# EAGLE board MP1584cir (EAGLE 9.3.0)
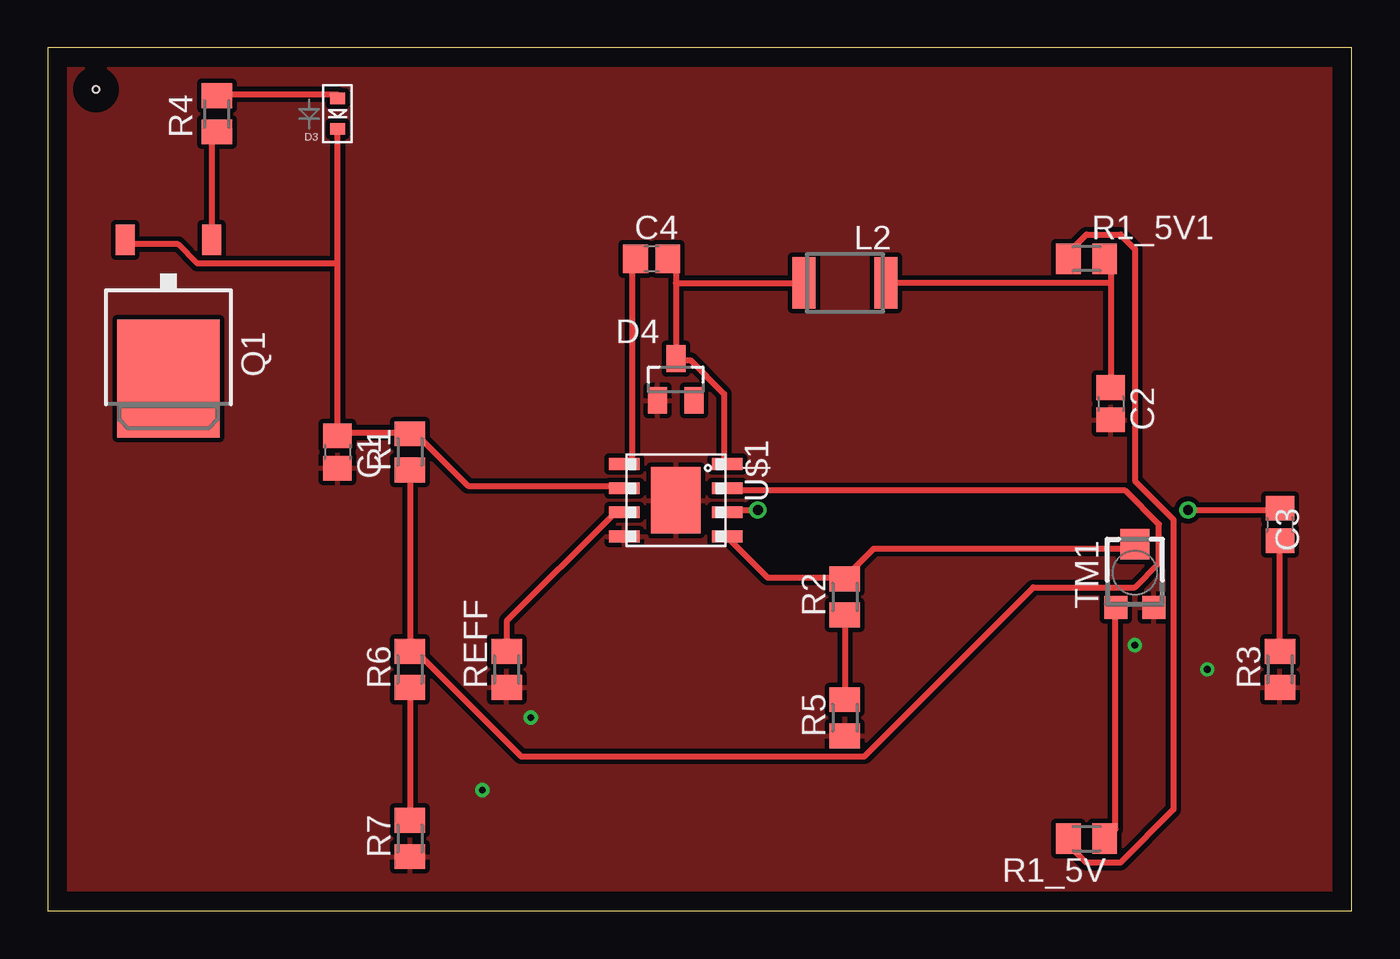
[diagram p0: board, top side]
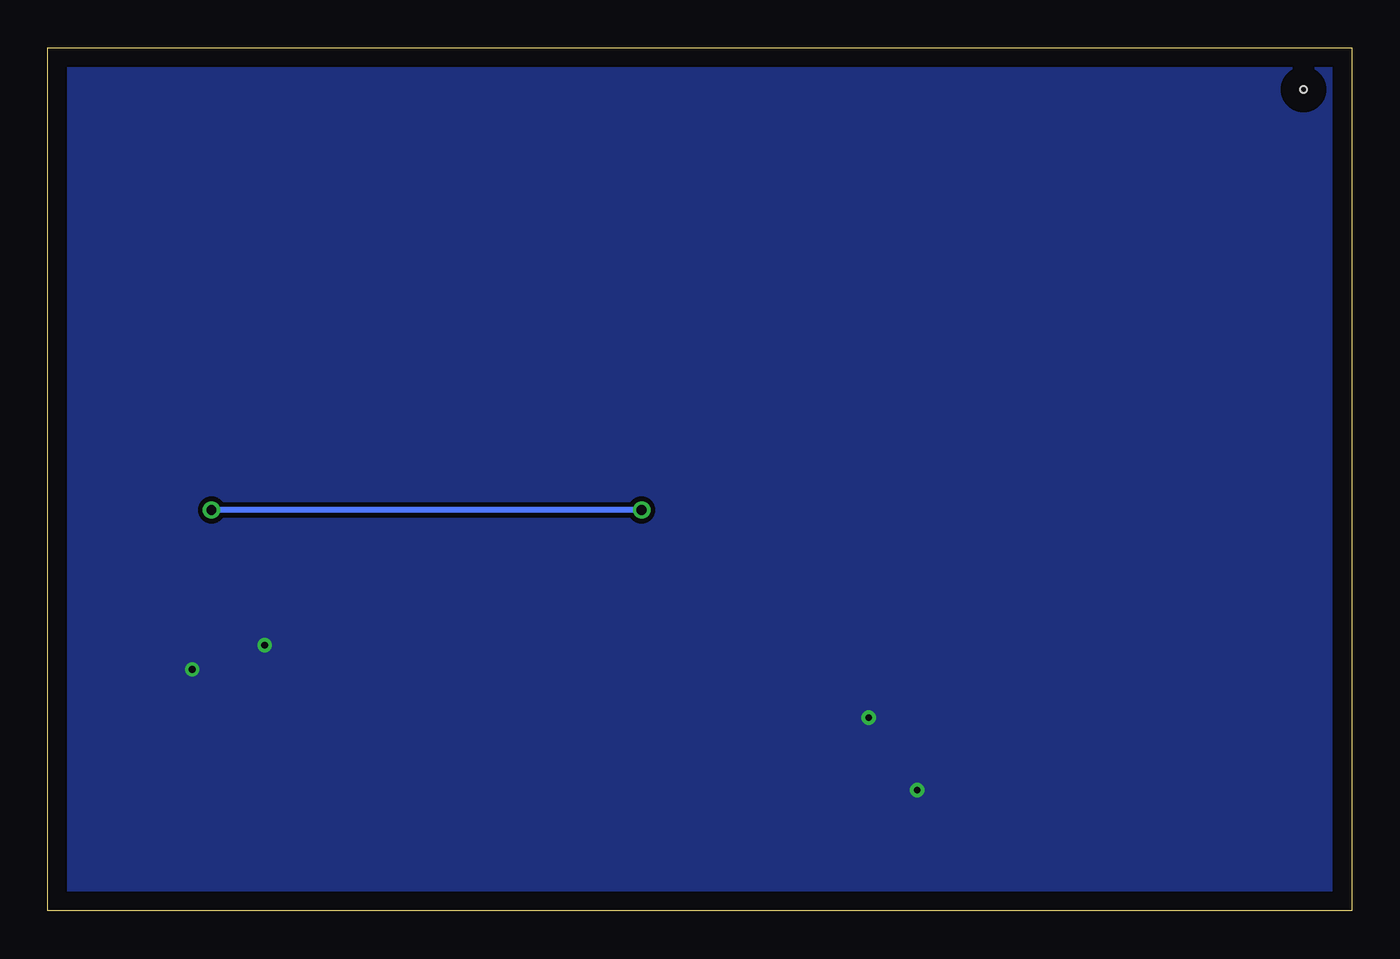
[diagram p1: board, bottom side, seen from below]

Size 68.56 x 45.39 mm. Coordinates in mm from the lower left corner, seen from the top.
Outline: 0,0 68.56,0 68.56,45.39 0,45.39 0,0
Copper layers (1*16): Top 0.035mm / dielectric 1.5mm / Bottom 0.035mm
Design rules "default": minimum track width 6mil, minimum drill 0.35mm, track to track 6mil, track to pad 6mil, pad to pad 6mil, via to via 6mil, smd to smd 6mil, copper to edge 40mil, drill to drill 6mil, minimum pad ring 10mil, minimum via ring 8mil, stop-mask expansion 4mil, vias tented up to drill 0mil, thermal gap 10mil
Net classes: 0 default: width 0.305 mm, drill 0.508 mm, clearance 0.254 mm
Holes 0.35 mm at 2.54,43.18

## Footprints (pad centres in the part's own frame; a part is rotated, then mirrored left to right if it is on the bottom)
C0805 = smd 1.3 x 1.5: 1 -0.85,0; 2 0.85,0
SOD-523 = smd 0.8 x 0.6: A 0,-0.8; K 0,0.8
SOT23 = smd 1 x 1.4: 1 -0.95,-1.1; 2 0.95,-1.1; 3 0,1.1
SM-NE45 = smd 1.2 x 2.7: 1 -2.15,0; 2 2.15,0
TO252 = smd 1 x 1.6: 1 -2.28,-4.8; 2 2.28,-4.8 | smd 5.4 x 6.2: 3 0,2.5
M0805 = smd 1.3 x 1.6: 1 -0.95,0; 2 0.95,0
TC33X = smd 1.2 x 1.2: 1 -1,-1.825; 3 1,-1.825 | smd 1.5 x 1.6: 2 0,1.5
MP = smd 3.51 x 2.62: BODY 0,0 | smd 0.61 x 1.6: P$1 -1.905,2.7; P$2 -0.635,2.7; P$3 0.635,2.7; P$4 1.905,2.7; P$5 1.905,-2.7; P$6 0.635,-2.7; P$7 -0.635,-2.7; P$8 -1.905,-2.7

## Placement (x,y rotation side)
C1  10u  [C0805]  15.24,24.13 270 top
C2  22u  [C0805]  55.88,26.67 270 top
C3  150p  [C0805]  64.77,20.32 270 top
C4  0.1u  [C0805]  31.75,34.29 0 top
D3  [SOD-523]  15.24,41.91 180 top
D4  BAT54  [SOT23]  33.02,27.94 0 top
L2  22u  [SM-NE45]  41.91,33.02 0 top
Q1  FDD4141TO252  [TO252]  6.35,30.48 180 top
R1  100k  [M0805]  19.05,24.13 90 top
R1_5V  200k  [M0805]  54.61,3.81 180 top
R1_5V1  10k  [M0805]  54.61,34.29 0 top
R2  1.2k  [M0805]  41.91,16.51 90 top
R3  100k  [M0805]  64.77,12.7 90 top
R4  100k  [M0805]  8.89,41.91 90 top
R5  39k  [M0805]  41.91,10.16 90 top
R6  0.91k  [M0805]  19.05,12.7 90 top
R7  24k  [M0805]  19.05,3.81 90 top
REFF  56  [M0805]  24.13,12.7 90 top
TM1  [TC33X]  57.15,17.78 0 top
U$1  MP1584  [MP]  33.02,21.59 270 top

## Library data of the parts
C1-C4 D3 R1 R1_5V R1_5V1 R2 R3 R5-R7 REFF TM1 = adafruit
D4 = diode
L2 = inductor-neosid; OC_FARNELL: unknown; OC_NEWARK: unknown
Q1 = transistor-fet
R4 = rcl; SPICEPREFIX: R
U$1 = mp1584S

## Nets
EN: R1.1 R6.2 U$1.P$2
GND: C1.2 C2.2 D4.1 R3.1 R5.1 R7.1 REFF.1 TM1.3 U$1.BODY U$1.P$5
N$1: REFF.2 U$1.P$6
N$2: C4.2 D4.3 L2.1 U$1.P$1
N$3: C4.1 U$1.P$8
N$4: R1_5V.1 TM1.1
N$5: C3.2 R3.2
N$6: Q1.1 R4.1
N$7: R2.1 R5.2
N$8: D3.A R4.2
N$9: R6.1 R7.2
N$10: R1_5V1.1 R1_5V.2
N$11: C3.1 U$1.P$3
P$1: C1.1 D3.K Q1.2 R1.2 U$1.P$7
V5: R2.2 TM1.2 U$1.P$4
VIN: Q1.3
VOUT: C2.1 L2.2 R1_5V1.2

## Tracks (layer width: path | path; a pad name or v marks a point on that pad's centre or on a via)
EN
  Top 0.305: R1.1 19.05,13.97 | 19.05,13.97 R6.2 19.05,13.72 | 19.05,13.97 24.89,8.13 42.93,8.13 51.82,17.02 57.15,17.02 58.42,18.29 58.42,20.32 56.64,22.1 35.81,22.1 U$1.P$2
GND  (via drill 0.35)
  other vias: 22.86,6.35 60.96,12.7 57.15,13.97 25.4,10.16
  pour Top: -1.27,45.72 69.85,45.72 69.85,-1.27 -1.27,-1.27
  pour Bottom: -1.27,46.99 -1.27,-1.27 69.85,-1.27 69.85,46.99
N$1
  Top 0.305: REFF.2 24.13,15.24 29.72,20.83 30.23,20.83 U$1.P$6
N$2
  Top 0.305: 33.02,33.02 33.02,34.04 32.77,34.29 C4.2 | 33.02,33.02 D4.3 33.02,28.96 33.78,28.96 35.56,27.18 35.56,23.62 U$1.P$1 | 33.02,33.02 L2.1
N$3
  Top 0.305: C4.1 30.73,34.29 30.73,23.88 30.48,23.62 U$1.P$8
N$4
  Top 0.305: TM1.1 56.13,15.75 56.13,4.32 55.63,3.81 R1_5V.1
N$5
  Top 0.305: R3.2 C3.2
N$6
  Top 0.305: Q1.1 8.64,35.31 8.64,40.64 8.89,40.89 R4.1
N$7
  Top 0.305: R2.1 R5.2
N$8
  Top 0.305: D3.A 15.24,42.93 8.89,42.93 R4.2
N$9
  Top 0.305: R6.1 R7.2
N$10
  Top 0.305: R1_5V.2 53.85,3.81 53.85,3.3 54.61,2.54 56.39,2.54 59.18,5.33 59.18,20.57 57.15,22.61 57.15,34.8 56.39,35.56 54.61,35.56 53.85,34.8 53.85,34.29 R1_5V1.1
N$11  (via drill 0.51)
  Top 0.305: v59.94,21.08 64.77,21.08 C3.1 | v37.34,21.08 35.81,21.08 U$1.P$3
  Bottom 0.305: v37.34,21.08 v59.94,21.08
P$1
  Top 0.305: 15.24,25.15 15.24,34.04 | 15.24,34.04 D3.K | 15.24,34.04 7.87,34.04 6.86,35.05 4.32,35.05 Q1.2 | 15.24,25.15 19.05,25.15 R1.2 19.05,24.89 19.56,24.89 22.1,22.35 30.23,22.35 U$1.P$7 | 15.24,25.15 C1.1
V5
  Top 0.305: 41.91,17.53 37.85,17.53 35.81,19.56 U$1.P$4 | 41.91,17.53 43.43,19.05 57.15,19.05 TM1.2 | 41.91,17.53 R2.2
VOUT
  Top 0.305: 55.88,33.02 55.88,34.04 55.63,34.29 R1_5V1.2 | 55.88,33.02 C2.1 | 55.88,33.02 L2.2